# Altium PCB LM-004-B.PcbDoc (part 2 of 2)
Units mil, origin at the board's own origin, x right, y up, seen from the top; angles counter-clockwise.
Board outline 2155.24 x 3589 mil, 4 copper layers (Top Layer, Signal Layer 2, Signal Layer 1, Bottom Layer), stack 30.635 mil thick; 59 components, 75 nets, 330 pads, 41 vias.
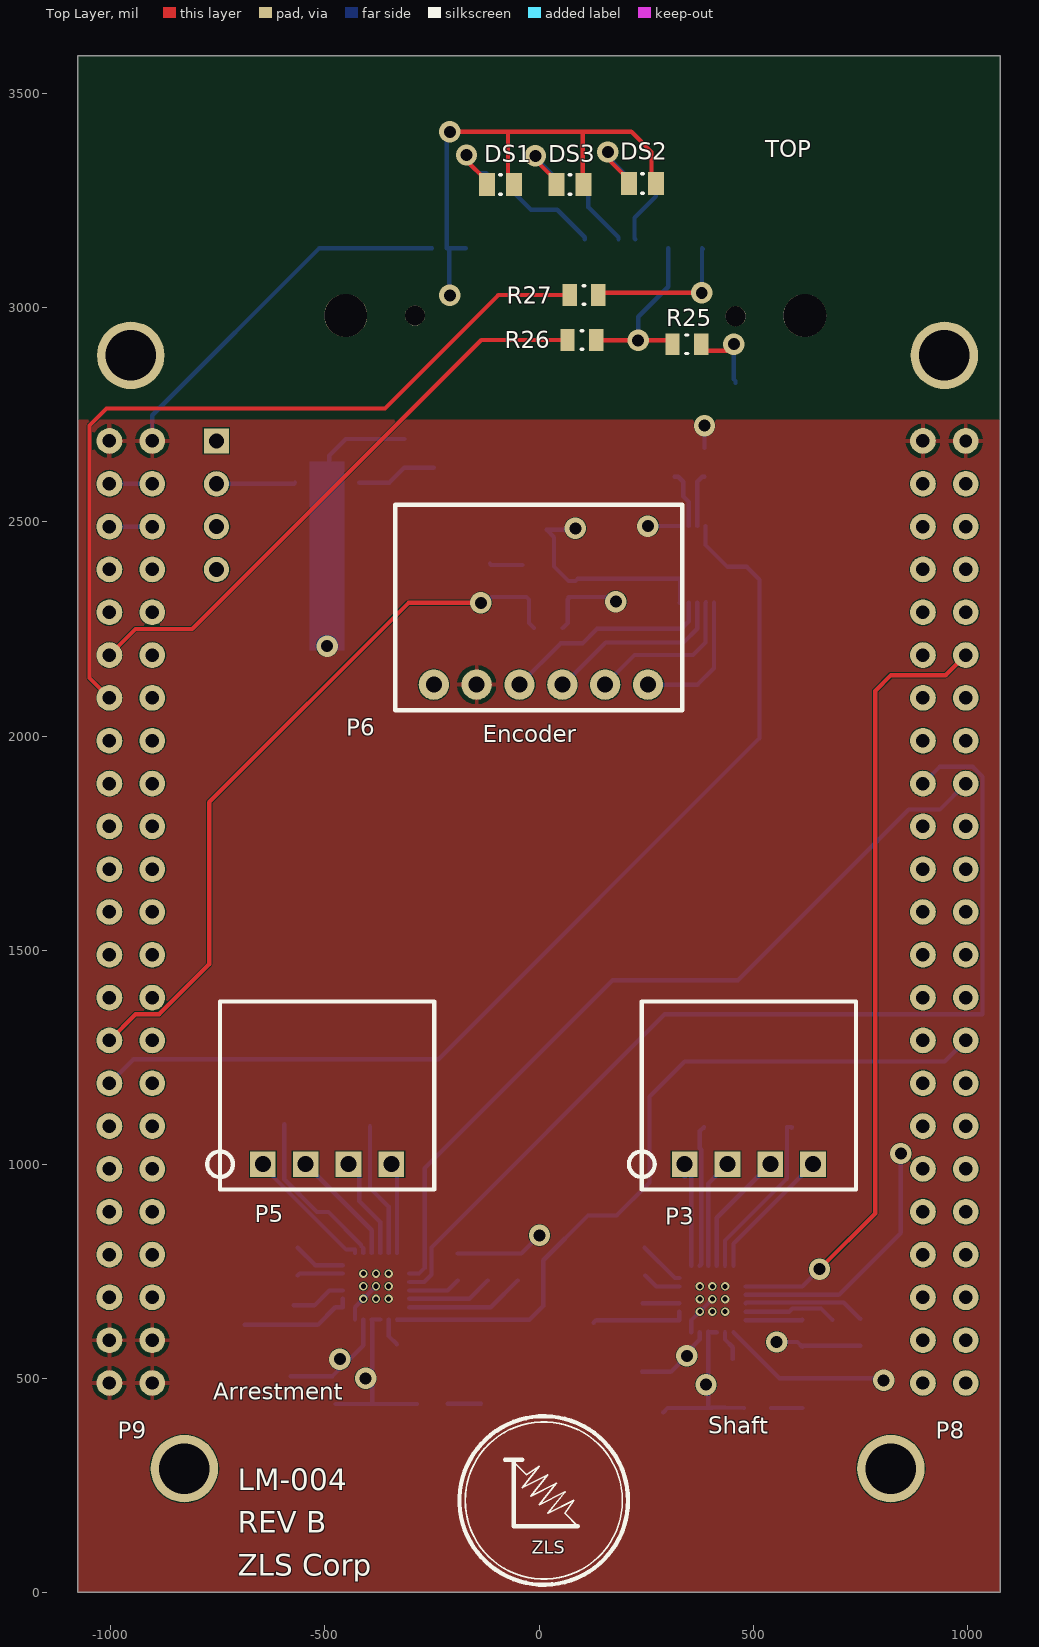
[diagram p0: Top Layer view]

## Via types
v1: diameter 50, hole 28, Top Layer to Bottom Layer, 23 vias
v2: diameter 19.68, hole 11.81, Top Layer to Bottom Layer, 18 vias

## Nets (pads, with @x,y where several pads share a name; then routed paths per layer and width w, separated by ;. In a path a pad name is that pad's centre, name@x,y a point inside that pad or via, vN(x,y) a via of type N, cw(c..) or ccw(c..) an arc to the next point about the centre after c; other vN are vias at no path point) (continued)
pads on no net: P7.hole P7.J2-5 P7.J2-6 P7.J2-7 P7.J2-8 P7.J2-9 P7.J2-10 P7.J2-12 P7.J2-15 P7.J2-17 P7.J2-19 P7.J2-20 P7.J3-1 P7.J3-2 P7.J3-3 P7.J3-4 P7.J3-5 P7.J3-6 P7.J3-7 P7.J3-8 P7.J3-9 P7.J3-10 P7.J3-11 P7.J3-12 P7.J3-13 P7.J3-14 P7.J3-15 P7.J3-16 P7.J3-17 P7.J3-18 P7.J3-19 U1. U1.8-3 U1.8-4 U1.8-5 U1.8-6 U1.8-7 U1.8-8 U1.8-13 U1.8-14 U1.8-15 U1.8-16 U1.8-19 U1.8-20 U1.8-21 U1.8-22 U1.8-23 U1.8-24 U1.8-25 U1.8-26 U1.8-28 U1.8-29 U1.8-31 U1.8-32 U1.8-33 U1.8-34 U1.8-39 U1.8-40 U1.8-41 U1.8-42 U1.8-43 U1.8-44 U1.8-45 U1.8-46 U1.9-7 U1.9-8 U1.9-10 U1.9-12 U1.9-14 U1.9-16 U1.9-17 U1.9-18 U1.9-19 U1.9-20 U1.9-21 U1.9-22 U1.9-23 U1.9-24 U1.9-25 U1.9-26 U1.9-27 U1.9-32 U1.9-33 U1.9-34 U1.9-35 U1.9-36 U1.9-37 U1.9-38 U1.9-39 U1.9-40 U1.9-41 U1.9-42 U2.22 U3.22 U6.5 U6.8
copper on no net:
  other v2: 375.47,655.47 405,655.47 434.53,655.47 375.47,685 405,685 434.53,685 -410.34,685.47 -380.81,685.47 -351.28,685.47 -410.34,715 -380.81,715 -351.28,715 375.47,714.53 405,714.53 434.53,714.53 -410.34,744.53 -380.81,744.53 -351.28,744.53

## Polygon pours and split planes (outlines as drawn)
GND on Bottom Layer "GND" (solid, pour order 8): 1077.62,2739 1077.62,0 -1077.62,0 -1077.62,2739
GND on Top Layer "GND" (solid, pour order 7): 1077.62,2739 1077.62,0 -1077.62,0 -1077.62,2739

## Other copper
Bottom Layer:
  region net VMOT: -455,2640 -535,2640 -535,2200 -455,2200

## Silkscreen, mask and mechanical layers (free items; w line width, h text height)
Top Overlay:
  circle w10: c11.1,214.61 r196.85
  circle w3.94: c11.1,214.61 r183.58
  lines w3.94: -59.39,304.61 -29.39,274.61 0.61,294.61 -39.39,244.61 20.61,274.61 -19.39,224.61 40.61,254.61 0.61,204.61 60.61,234.61 20.61,184.61 80.61,214.61 60.61,184.61 90.61,154.61
  lines w10: -79.39,309.61 -39.39,309.61 ; -59.39,304.61 -59.39,154.61 90.61,154.61
  text "TOP" at 528.62,3352 h39.37
  text "Encoder" at -131,1986 h39.37
  text "Arrestment" at -760.38,450 h39.37
  text "Shaft" at 394.62,370 h39.37
  text "LM-004" at -703.38,239 h50
  text "REV B" at -703.38,139 h50
  text "ZLS" at -16.6,90.16 h29.53
  text "ZLS Corp" at -703.38,39 h50

## Dimensions
-1077.62,0 to -1077.62,3589 on Mechanical 13
-1077.62,3589 to 1077.62,3589 on Mechanical 13

## Text inside footprints (layer, text, board x,y; h text height)
P7: Bottom Overlay "J3-1" at -647.9,2777.99 h39.37; Bottom Overlay "J2-1" at -637.9,3107.99 h39.37
U1: Top Overlay "P9" at -983.38,359 h39.37; Top Overlay "P8" at 926.62,359 h39.37